# Altium PCB quark_dog_control.PcbDoc (part 1 of 2)
Units mm, origin at the board's own origin, x right, y up, seen from the top; angles counter-clockwise.
Board outline 100 x 60 mm, 4 copper layers (Top Layer 1, GND, VCC, Bottom Layer 1), stack 0.603 mm thick; 105 components, 131 nets, 600 pads, 305 vias.
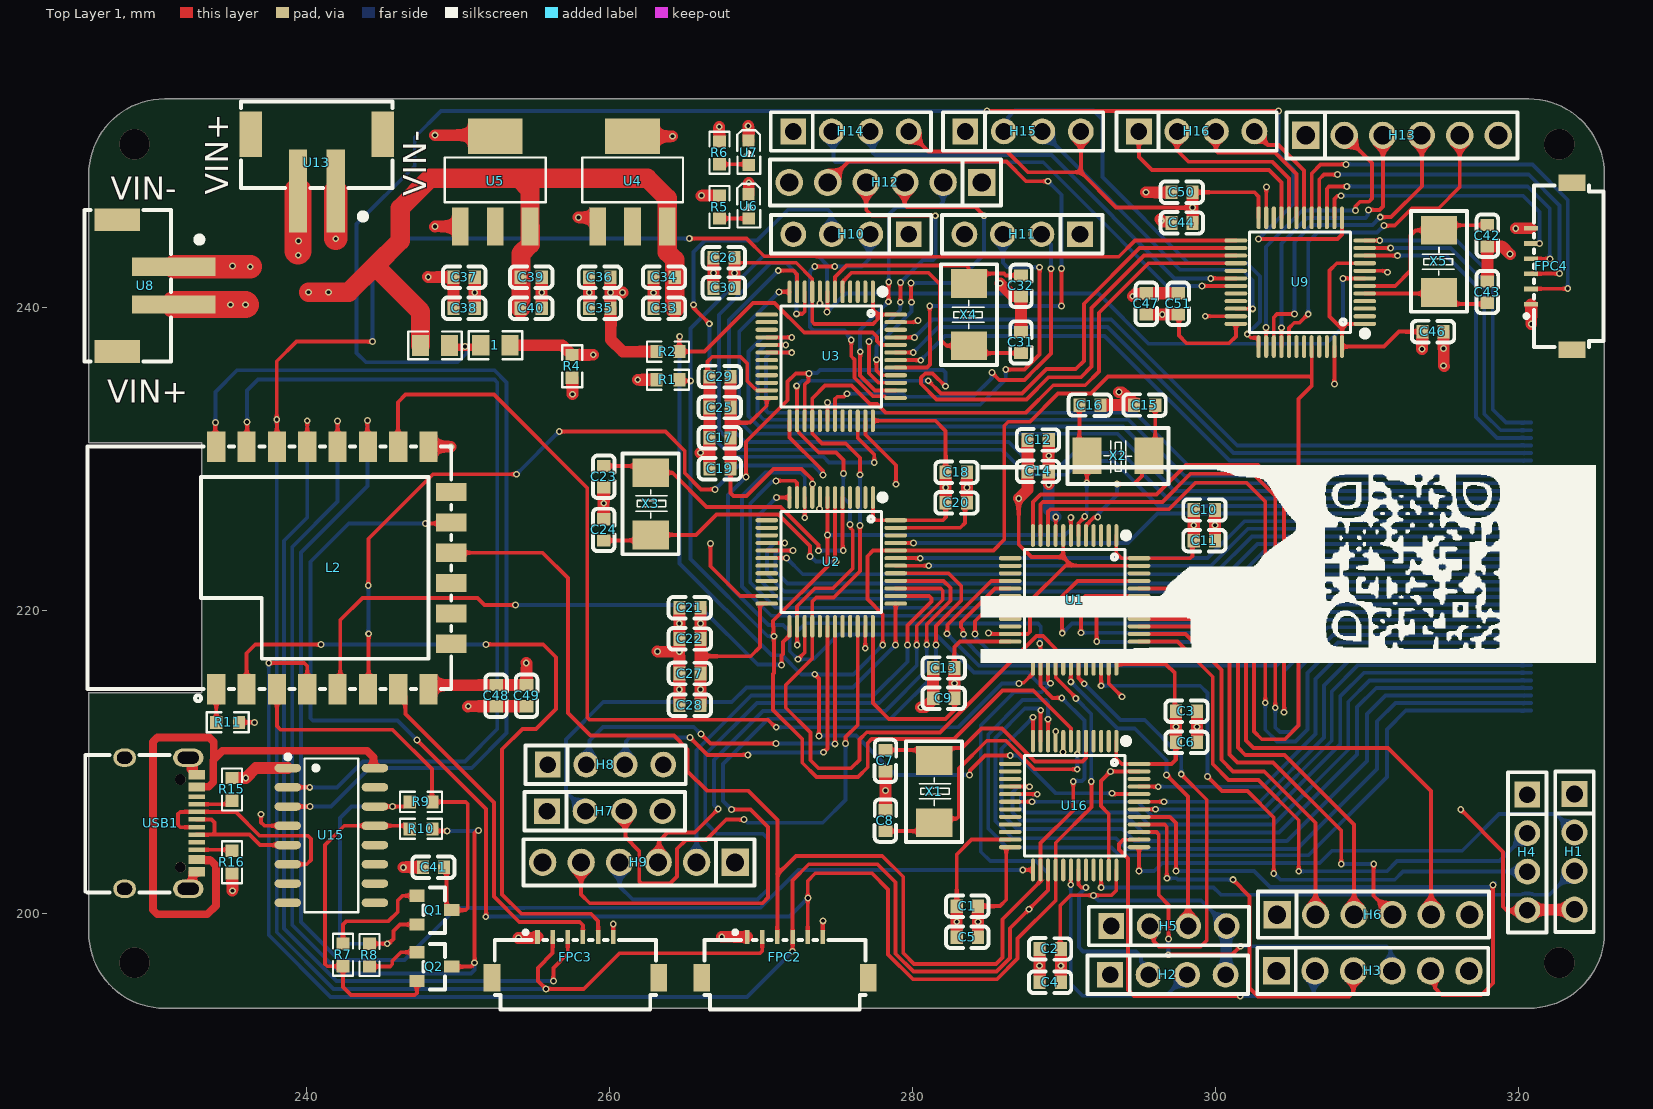
[diagram p0: Top Layer 1 view]
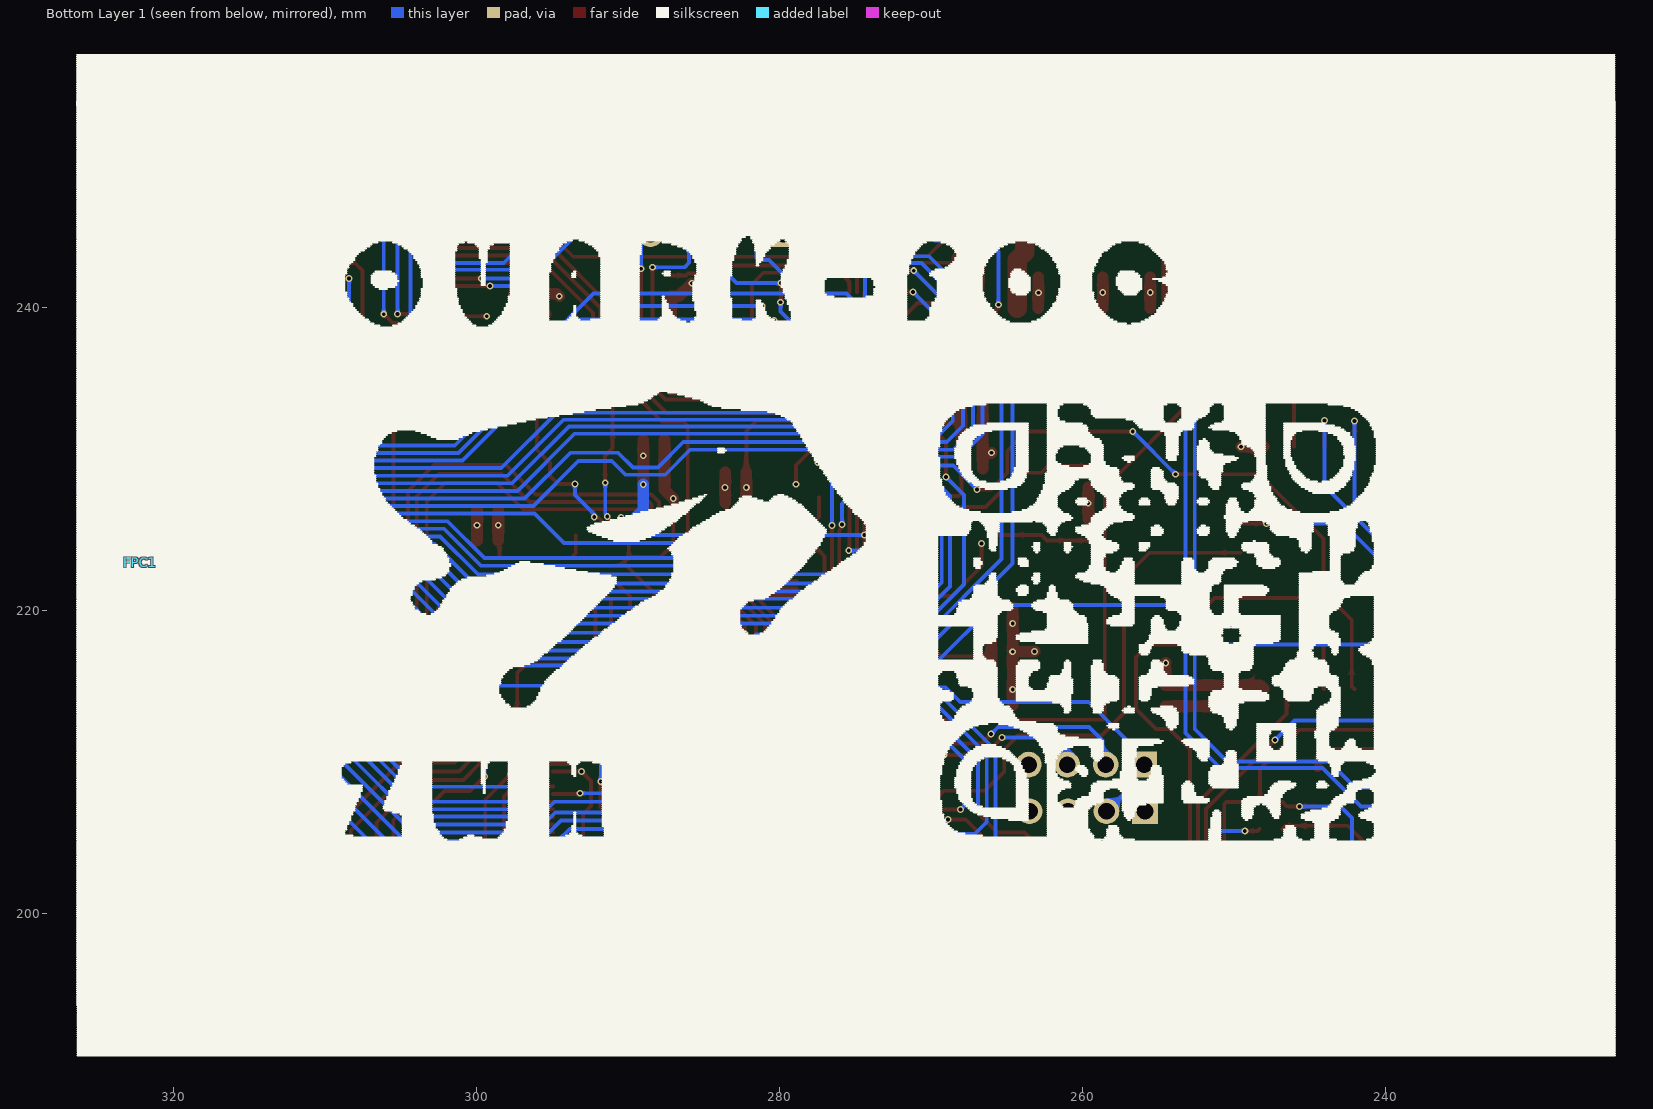
[diagram p1: Bottom Layer 1 view, seen from below]
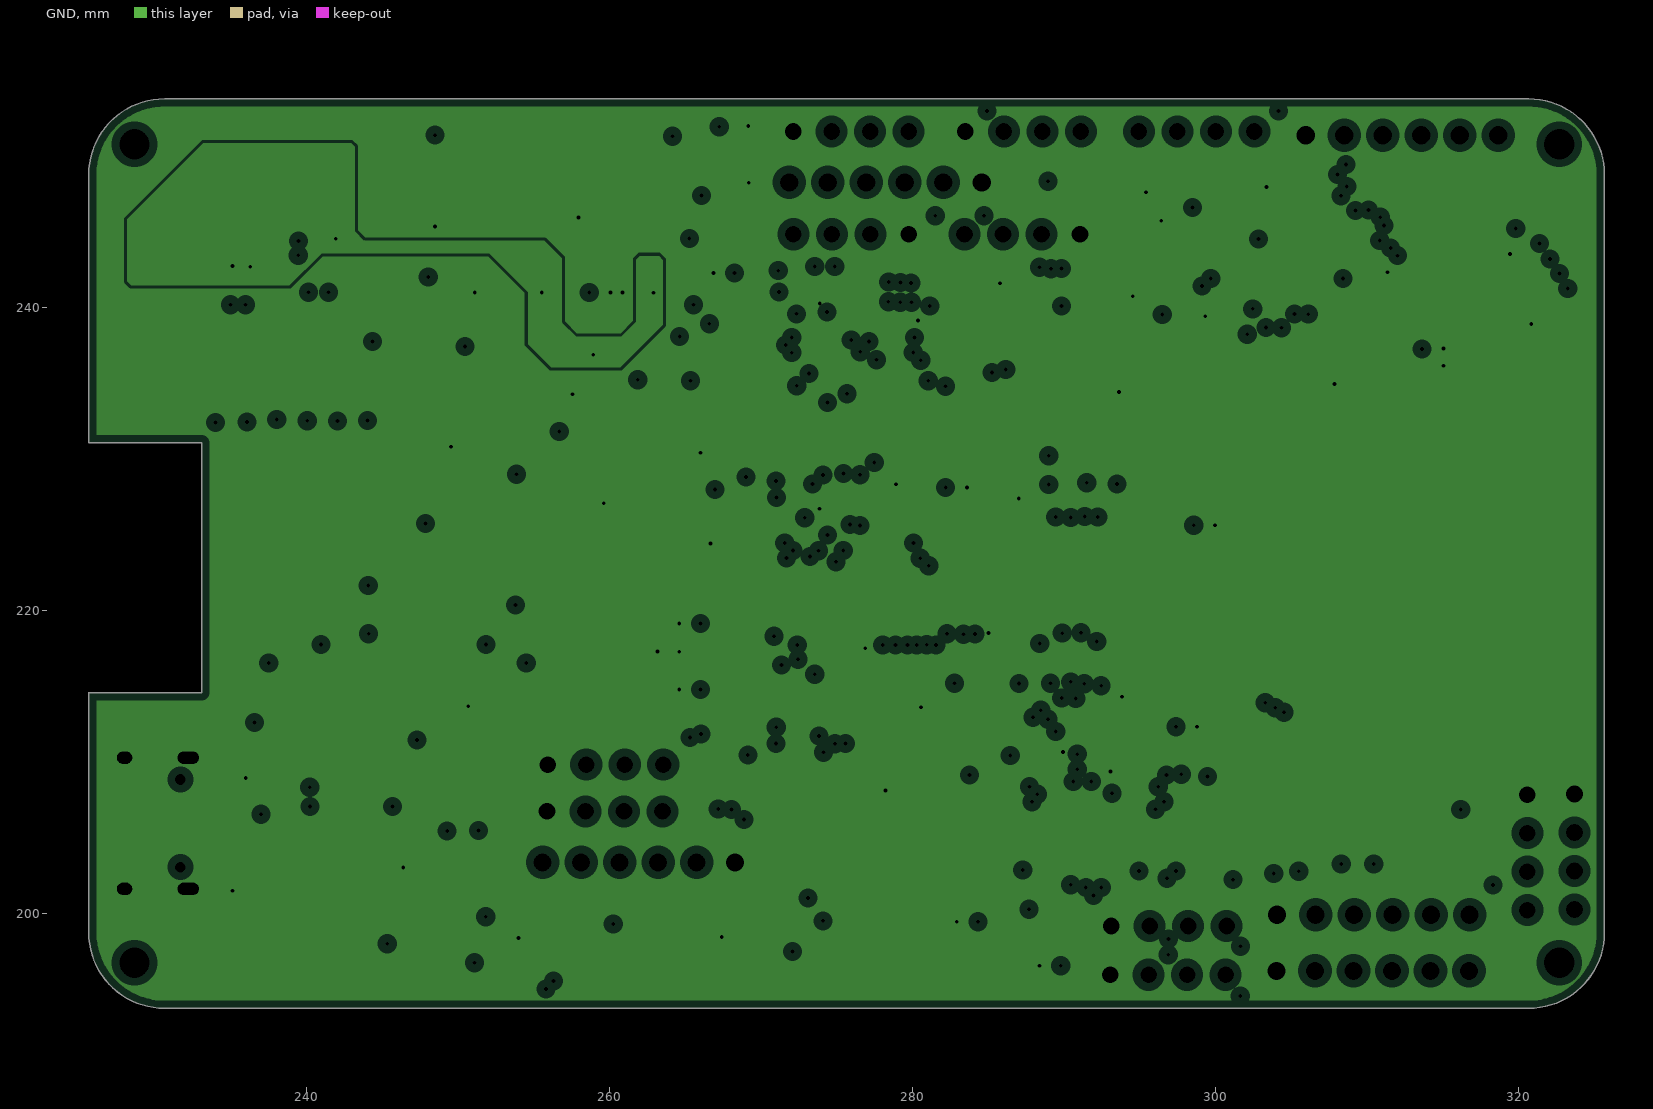
[diagram p2: GND, clearances drawn from the general rule]
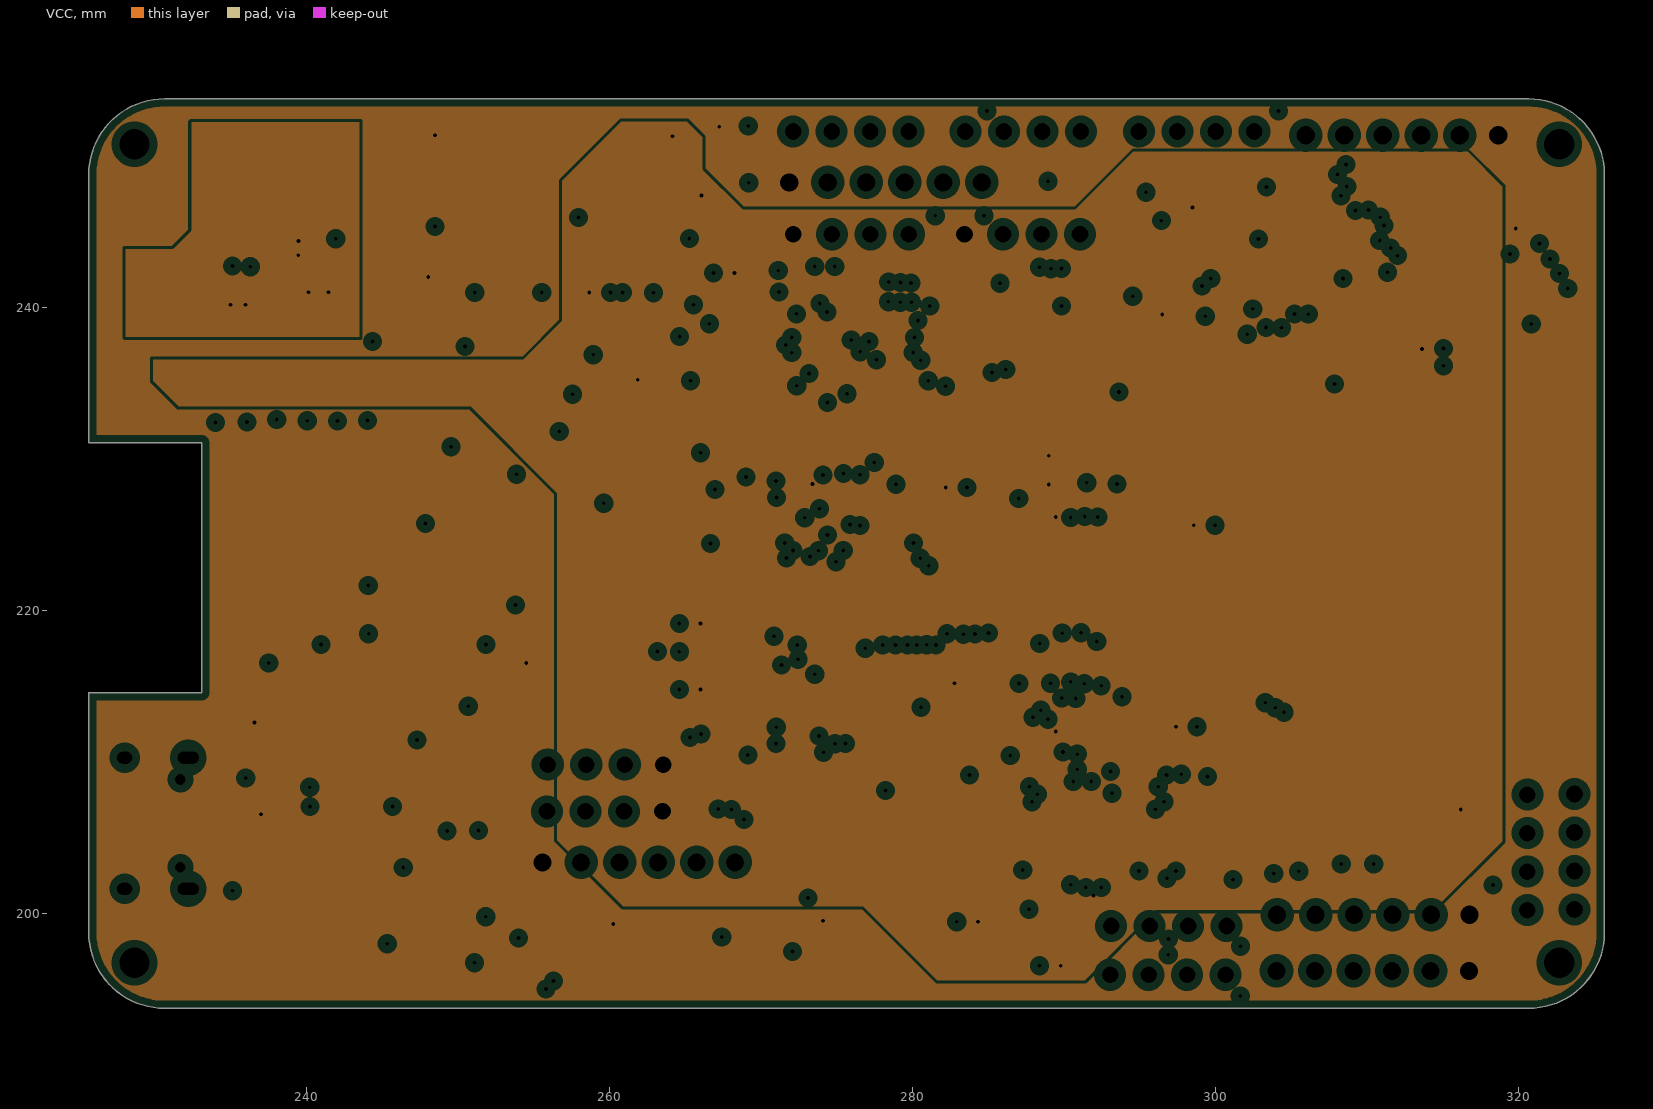
[diagram p3: VCC, clearances drawn from the general rule]

## Layer stack, top to bottom
Top Solder: solder mask 0.0102, Solder Resist, Dk 3.5
Top Layer 1: signal copper 0.035
Dielectric 2: prepreg 0.0711, PP-006, Dk 4.1
GND: plane copper 0.0356, net (Multiple Nets)
Dielectric 1: dielectric 0.32, FR-4, Dk 4.8
VCC: plane copper 0.0356, net (Multiple Nets)
Dielectric 3: prepreg 0.0711, PP-006, Dk 4.1
Bottom Layer 1: signal copper 0.035
Bottom Solder: solder mask 0.0102, Solder Resist, Dk 3.5

## Board outline
225.643,198.731 225.643,214.557 225.646,214.56 233.1,214.56 233.11,214.57 233.11,231.05 225.646,231.05 225.643,231.047 225.643,248.731 cw(c230.643,248.731) 230.643,253.731 320.643,253.731 cw(c320.643,248.731) 325.643,248.731 325.639,248.702 325.639,198.74 325.643,198.731 cw(c320.643,198.731) 320.643,193.731 320.559,193.737 230.643,193.737 230.643,193.731 cw(c230.643,198.731)

## Design rules (kind name [scope] priority, off if disabled: settings)
Clearance [All] p1: gap=0.127 ignorepadtopadclearanceinfootprint=FALSE
PlaneClearance [All] p1: clearance=0.508
PlaneConnect [All] p1: planeconnectstyle=Relief reliefexpansion=0.508 reliefentries=4 reliefconductorwidth=0.254 reliefairgap=0.254
PolygonConnect [All] p1: connectstyle=Relief reliefconductorwidth=0.254 reliefentries=4 polygonreliefangle="90 Angle" airgapwidth=0.254
RoutingVias [All] p1: holewidth=0.711 width=1.27 viastyle="Through Hole" minholewidth=0.711 minwidth=1.27 maxholewidth=0.711 maxwidth=1.27
SolderMaskExpansion [All] p1: expansion=0.102 istentingtop=FALSE
Width [All] p1: maxlimit=50 minlimit=0.254 preferedwidth=0.254 minimp=50.000000 maximp=50.000000 favimp=50.000000
28 further rules are at their usual default settings.

## Components (designator, comment, footprint, x,y, rotation, side; value= is the part's Value field where it differs from the comment)
1 "R0805" R0805 252.476,237.48 r0 top
C1 "0.1u" C0603 283.61,200.47 r0 top
C2 "0.1u" C0603 289.08,197.647 r0 top
C3 "0.1u" C0603 298.07,213.33 r180 top
C4 "0.1u" C0603 289.08,195.441 r0 top
C5 "0.1u" C0603 283.61,198.42 r0 top
C6 "0.1u" C0603 298.07,211.28 r180 top
C7 "22p" C0603 278.21,210.07 r90 top
C8 "22p" C0603 278.21,206.12 r90 top
C9 "0.1u" C0603 282.06,214.18 r0 top
C10 "0.1u" C0603 299.25,226.61 r180 top
C11 "0.1u" C0603 299.25,224.59 r180 top
C12 "0.1u" C0603 288.28,231.23 r0 top
C13 "0.1u" C0603 282.06,216.18 r0 top
C14 "0.1u" C0603 288.28,229.15 r0 top
C15 "22p" C0603 295.31,233.53 r0 top
C16 "22p" C0603 291.7,233.53 r0 top
C17 "0.1u" C0603 267.29,231.378 r0 top
C18 "0.1u" C0603 282.88,229.09 r180 top
C19 "0.1u" C0603 267.29,229.33 r0 top
C20 "0.1u" C0603 282.88,227.08 r180 top
C21 "0.1u" C0603 265.31,220.15 r0 top
C22 "0.1u" C0603 265.31,218.1 r0 top
C23 "22p" C0603 259.62,228.81 r90 top
C24 "22p" C0603 259.62,225.3 r90 top
C25 "0.1u" C0603 267.29,233.37 r0 top
C26 "0.1u" C0603 267.554,243.248 r0 top
C27 "0.1u" C0603 265.31,215.82 r0 top
C28 "0.1u" C0603 265.31,213.72 r0 top
C29 "0.1u" C0603 267.29,235.41 r0 top
C30 "0.1u" C0603 267.554,241.26 r0 top
C31 "22p" C0603 287.15,237.66 r270 top
C32 "22p" C0603 287.15,241.39 r270 top
C33 "0.1u" C0603 263.61,239.92 r0 top
C34 "10u" C0603 263.61,241.97 r0 top
C35 "10u" C0603 259.36,239.925 r180 top
C36 "0.1u" C0603 259.36,241.975 r180 top
C37 "0.1u" C0603 250.41,241.975 r180 top
C38 "10u" C0603 250.41,239.925 r180 top
C39 "10u" C0603 254.83,241.975 r180 top
C40 "0.1u" C0603 254.83,239.925 r180 top
C41 "1u" C0603 248.39,203.04 r0 top
C42 "22p" C0603 317.92,244.7 r270 top
C43 "22p" C0603 317.92,240.98 r270 top
C44 "0.1u" C0603 297.77,245.548 r0 top
C46 "0.1u" C0603 314.33,238.38 r180 top
C47 "0.1u" C0603 295.42,240.21 r270 top
C48 "0.1u" C0603 252.52,214.36 r90 top
C49 "10u" C0603 254.53,214.36 r90 top
C50 "0.1u" C0603 297.77,247.57 r0 top
C51 "0.1u" C0603 297.52,240.21 r270 top
FPC1 "FPC-05F-40PH15" FPC-SMD_40P-P0.50_FPC-05F-40PH15 322.16,223.12 r270 bottom locked
FPC2 "1.0K-1.5-6PWB" FPC-SMD_6P-P1.00_HDGC_1.0K-1.5-6PWB 271.58,197.09 r0 top
FPC3 "1.0K-1.5-6PWB" FPC-SMD_6P-P1.00_HDGC_1.0K-1.5-6PWB 257.75,197.09 r0 top
FPC4 "1.0K-1.5-6PWB" FPC-SMD_6P-P1.00_HDGC_1.0K-1.5-6PWB 322.15,242.69 r90 top
H1 "Z-211-0411-0021-001" HDR-TH_4P-P2.54-V-M 323.67,204.06 r270 top
H2 "Z-211-0411-0021-001" HDR-TH_4P-P2.54-V-M 296.84,195.946 r0 top
H3 "Z-211-0611-0021-001" HDR-TH_6P-P2.54-V_Z-211-0611-0021-001 310.36,196.2 r0 top
H4 "Z-211-0411-0021-001" HDR-TH_4P-P2.54-V-M 320.56,204.02 r270 top
H5 "Z-211-0411-0021-001" HDR-TH_4P-P2.54-V-M 296.91,199.16 r0 top
H6 "Z-211-0611-0021-001" HDR-TH_6P-P2.54-V_Z-211-0611-0021-001 310.4,199.91 r0 top
H7 "Z-211-0411-0021-001" HDR-TH_4P-P2.54-V-M 259.69,206.73 r0 top
H8 "Z-211-0411-0021-001" HDR-TH_4P-P2.54-V-M 259.74,209.81 r0 top
H9 "Z-211-0611-0021-001" HDR-TH_6P-P2.54-V_Z-211-0611-0021-001 261.94,203.36 r180 top
H10 "Z-211-0411-0021-001" HDR-TH_4P-P2.54-V-M 275.94,244.8 r180 top
H11 "Z-211-0411-0021-001" HDR-TH_4P-P2.54-V-M 287.23,244.8 r180 top
H12 "Z-211-0611-0021-001" HDR-TH_6P-P2.54-V_Z-211-0611-0021-001 278.21,248.22 r180 top
H13 "Z-211-0611-0021-001" HDR-TH_6P-P2.54-V_Z-211-0611-0021-001 312.29,251.33 r0 top
H14 "Z-211-0411-0021-001" HDR-TH_4P-P2.54-V-M 275.93,251.584 r0 top
H15 "Z-211-0411-0021-001" HDR-TH_4P-P2.54-V-M 287.29,251.584 r0 top
H16 "Z-211-0411-0021-001" HDR-TH_4P-P2.54-V-M 298.74,251.584 r0 top
L2 "ESP32-C3F-2M" WIFIM-SMD_ESP32-C3F-2M 241.81,222.79 r90 top locked
Q1 "S8050LT1-J3Y" SOT-23_L2.9-W1.3-P1.90-LS2.4-BR 248.44,200.21 r180 top
Q2 "S8050LT1-J3Y" SOT-23_L2.9-W1.3-P1.90-LS2.4-BR 248.44,196.48 r180 top
R1 "10k" R0603 263.86,235.2 r0 top
R2 "1k" R0603 263.86,237.06 r0 top
R4 "0Ω" R0603 257.54,236.09 r270 top
R5 "1KΩ" R0603 267.26,246.598 r90 top
R6 "1KΩ" R0603 267.26,250.175 r270 top
R7 "4.7k" R0603 242.42,197.26 r270 top
R8 "4.7k" R0603 244.17,197.243 r90 top
R9 "4.7k" R0603 247.57,207.35 r180 top
R10 "4.7k" R0603 247.57,205.57 r0 top
R11 "4.7k" R0603 234.81,212.6 r0 top
R15 "5.1k" R0603 235.09,208.173 r90 top
R16 "5.1k" R0603 235.09,203.37 r270 top
U1 "STM32F103C8T6" LQFP-48_L7.0-W7.0-P0.50-LS9.0-BL 290.69,220.677 r180 top
U2 "STM32F103C8T6" LQFP-48_L7.0-W7.0-P0.50-LS9.0-BL 274.63,223.183 r180 top
U3 "STM32F103C8T6" LQFP-48_L7.0-W7.0-P0.50-LS9.0-BL 274.63,236.75 r180 top
U4 "AMS1117-3.3" SOT-223-3_L6.5-W3.4-P2.30-LS7.0-BR 261.52,248.29 r270 top
U5 "AMS1117-3.3" SOT-223-3_L6.5-W3.4-P2.30-LS7.0-BR 252.46,248.29 r270 top
U6 "LED_0603_R" LED0603-RD 269.184,246.641 r270 top
U7 "LED_0603_R" LED0603-RD 269.184,250.179 r270 top
U8 "WAFER-XH2.54-2PLB" CONN-SMD_2P-P2.50_XUNPU_WAFER-XH2.54-2PLB 229.385,241.41 r270 top
U9 "STM32F103C8T6" LQFP-48_L7.0-W7.0-P0.50-LS9.0-BL 305.58,241.64 r90 top
U13 "WAFER-XH2.54-2PLB" CONN-SMD_2P-P2.50_XUNPU_WAFER-XH2.54-2PLB 240.69,249.53 r180 top
U15 "CH340C" SOP-16_L10.0-W3.9-P1.27-LS6.0-BL 241.65,205.14 r270 top
U16 "STM32F103C8T6" LQFP-48_L7.0-W7.0-P0.50-LS9.0-BL 290.69,207.11 r180 top
USB1 "TYPE-C 16PIN 2MD(073)" USB-C-SMD_TYPE-C-6PIN-2MD-073 230.385,205.94 r270 top
X1 "8MHz" OSC-SMD_L5.0-W3.2 281.42,208.03 r90 top
X2 "8MHz" OSC-SMD_L5.0-W3.2 293.555,230.18 r0 top
X3 "8MHz" OSC-SMD_L5.0-W3.2 262.716,227.018 r90 top
X4 "8MHz" OSC-SMD_L5.0-W3.2 283.72,239.5 r270 top
X5 "8MHz" OSC-SMD_L5.0-W3.2 314.73,243.01 r270 top
? "R0805" R0805 248.49,237.47 r180 top

## Footprints (in the part's own frame and the unit in brackets; to place one, negate y for a bottom-side part, rotate by r counter-clockwise, add the part's x,y. Pads: shape width x height; smd on the part's side, far side on the other; paste and mask are expansions set on the pad)
C0603 [mm]
  rect 0.8x0.9 smd: 1(-0.7,0) 2(0.7,0)
  silkscreen extent -1.41,-0.71 1.39,0.72
CONN-SMD_2P-P2.50_XUNPU_WAFER-XH2.54-2PLB [mm]
  rect 1.2x5.5 smd: 1(-1.25,1.875) 2(1.25,1.875)
  rect 1.5x3 smd: 3(4.35,-1.875) 4(-4.35,-1.875)
  silkscreen extent -5,-4.02 5,3.76
FPC-SMD_6P-P1.00_HDGC_1.0K-1.5-6PWB [mm]
  rect 0.3x0.9 smd: 1(-2.5,1.35) 2(-1.5,1.35) 3(-0.5,1.35) 4(0.5,1.35) 5(1.5,1.35) 6(2.5,1.35)
  rect 1.1x1.8 smd: 7(5.5,-1.35) 8(-5.5,-1.35)
  silkscreen extent -5.32,-3.43 5.32,1.78
FPC-SMD_40P-P0.50_FPC-05F-40PH15 [mm]
  rect 0.3x0.9 smd: 1(-9.75,1.35) 2(-9.25,1.35) 3(-8.75,1.35) 4(-8.25,1.35) 5(-7.75,1.35) 6(-7.25,1.35) 7(-6.75,1.35) 8(-6.25,1.35) 9(-5.75,1.35) 10(-5.25,1.35) 11(-4.75,1.35) 12(-4.25,1.35) 13(-3.75,1.35) 14(-3.25,1.35) 15(-2.75,1.35) 16(-2.25,1.35) 17(-1.75,1.35) 18(-1.25,1.35) 19(-0.75,1.35) 20(-0.25,1.35) 21(0.25,1.35) 22(0.75,1.35) 23(1.25,1.35) 24(1.75,1.35) 25(2.25,1.35) 26(2.75,1.35) 27(3.25,1.35) 28(3.75,1.35) 29(4.25,1.35) 30(4.75,1.35) 31(5.25,1.35) 32(5.75,1.35) 33(6.25,1.35) 34(6.75,1.35) 35(7.25,1.35) 36(7.75,1.35) 37(8.25,1.35) 38(8.75,1.35) 39(9.25,1.35) 40(9.75,1.35)
  rect 1.1x1.8 smd: 41(11.9,-1.35) 42(-11.9,-1.35)
  silkscreen extent -12.05,-3.35 12.05,1.82
HDR-TH_4P-P2.54-V-M [mm]
  rect 1.7x1.7 hole 1.1: 1(-3.81,0)
  round 1.7 hole 1.1: 2(-1.27,0) 3(1.27,0) 4(3.81,0)
  silkscreen extent -5.29,-1.27 5.29,1.27
HDR-TH_6P-P2.54-V_Z-211-0611-0021-001 [mm]
  rect 1.8x1.8 hole 1.2: 1(-6.35,0)
  round 1.8 hole 1.2: 2(-3.81,0) 3(-1.27,0) 4(1.27,0) 5(3.81,0) 6(6.35,0)
  silkscreen extent -7.62,-1.52 7.62,1.52
LED0603-RD [mm]
  rect 0.8x0.8 smd: 1(-0.799,-0.003) 2(0.799,0.004)
  silkscreen extent -1.49,-0.75 1.39,0.76
LQFP-48_L7.0-W7.0-P0.50-LS9.0-BL [mm]
  oval 0.27x1.5 smd: 1(-2.75,-4.25) 2(-2.25,-4.25) 3(-1.75,-4.25) 4(-1.25,-4.25) 5(-0.75,-4.25) 6(-0.25,-4.25) 7(0.25,-4.25) 8(0.75,-4.25) 9(1.25,-4.25) 10(1.75,-4.25) 11(2.25,-4.25) 12(2.75,-4.25) 25(2.75,4.25) 26(2.25,4.25) 27(1.75,4.25) 28(1.25,4.25) 29(0.75,4.25) 30(0.25,4.25) 31(-0.25,4.25) 32(-0.75,4.25) 33(-1.25,4.25) 34(-1.75,4.25) 35(-2.25,4.25) 36(-2.75,4.25)
  oval 1.5x0.27 smd: 13(4.25,-2.75) 14(4.25,-2.25) 15(4.25,-1.75) 16(4.25,-1.25) 17(4.25,-0.75) 18(4.25,-0.25) 19(4.25,0.25) 20(4.25,0.75) 21(4.25,1.25) 22(4.25,1.75) 23(4.25,2.25) 24(4.25,2.75) 37(-4.25,2.75) 38(-4.25,2.25) 39(-4.25,1.75) 40(-4.25,1.25) 41(-4.25,0.75) 42(-4.25,0.25) 43(-4.25,-0.25) 44(-4.25,-0.75) 45(-4.25,-1.25) 46(-4.25,-1.75) 47(-4.25,-2.25) 48(-4.25,-2.75)
  silkscreen extent -3.59,-4.46 3.3,3.34
OSC-SMD_L5.0-W3.2 [mm]
  rect 1.9x2.4 smd: 1(-2.05,0) 2(2.05,0)
  silkscreen extent -3.32,-1.85 3.33,1.85
R0603 [mm]
  rect 0.806x0.864 smd: 1(-0.753,0) 2(0.753,0)
  silkscreen extent -1.39,-0.66 1.39,0.66
R0805 [mm]
  rect 1.133x1.377 smd mask+0.051: 1(-0.966,0) 2(0.966,0)
  silkscreen extent -1.76,-0.92 1.76,0.92
SOP-16_L10.0-W3.9-P1.27-LS6.0-BL [mm]
  oval 0.56x1.745 smd: 1(-4.445,-2.873) 2(-3.175,-2.873) 3(-1.905,-2.873) 4(-0.635,-2.873) 5(0.635,-2.873) 6(1.905,-2.873) 7(3.175,-2.873) 8(4.445,-2.873) 9(4.445,2.873) 10(3.175,2.873) 11(1.905,2.873) 12(0.635,2.873) 13(-0.635,2.873) 14(-1.905,2.873) 15(-3.175,2.873) 16(-4.445,2.873)
  silkscreen extent -5.33,-3.02 5.08,1.77
SOT-23_L2.9-W1.3-P1.90-LS2.4-BR [mm]
  rect 1x0.8 smd: 1(1.15,-0.95) 2(1.15,0.95) 3(-1.15,0)
  silkscreen extent -0.7,-1.5 0.7,1.5
SOT-223-3_L6.5-W3.4-P2.30-LS7.0-BR [mm]
  rect 2.5x1.1 smd: 1(2.97,-2.3) 2(2.97,0) 3(2.97,2.3)
  rect 2.34x3.6 smd: 4(-2.97,0)
  silkscreen extent -1.57,-3.33 1.37,3.33
USB-C-SMD_TYPE-C-6PIN-2MD-073 [mm]
  rect 0.6x1.1 smd: 1(-3.2,2.375) 2(-2.4,2.375) 11(2.4,2.375) 12(3.2,2.375)
  rect 0.3x1.1 smd: 3(-1.75,2.375) 4(-1.25,2.375) 5(-0.75,2.375) 6(-0.25,2.375) 7(0.25,2.375) 8(0.75,2.375) 9(1.25,2.375) 10(1.75,2.375)
  oval 1.2x2 hole 0.8 slot 1.4 at 90 deg: 13(-4.325,1.825) 14(4.325,1.825)
  oval 1.2x1.5 hole 0.8 slot 1 at 90 deg: 13(-4.325,-2.375) 14(4.325,-2.375)
  round 0.7 hole 0.7 unplated: ""(-2.89,1.305) ""(2.89,1.305)
  silkscreen extent -4.5,-4.97 4.57,0.6
WIFIM-SMD_ESP32-C3F-2M [mm]
  rect 2x1.2 smd: 1(-8,7.75) 2(-8,5.75) 3(-8,3.75) 4(-8,1.75) 5(-8,-0.25) 6(-8,-2.25) 7(-8,-4.25) 8(-8,-6.25) 15(8,-6.25) 16(8,-4.25) 17(8,-2.25) 18(8,-0.25) 19(8,1.75) 20(8,3.75) 21(8,5.75) 22(8,7.75)
  rect 1.2x2 smd: 9(-5,-7.75) 10(-3,-7.75) 11(-1,-7.75) 12(1,-7.75) 13(3,-7.75) 14(5,-7.75)
  silkscreen extent -8.8,-7.75 8,16.25

## Part data
C33 C34 C35 C36 C37 C38 C39 C40 C41 C48 C49: Package Display=No, Contributor=LCEDA_Lib, nameAlias=Value(F), spicePre=C, spiceSymbolName=C_0603_US
FPC1 U8 U13: BOM_JLCPCB Part Class="Extended Part", BOM_Manufacturer=XUNPU(讯普), BOM_Supplier=LCSC
  FPC1: BOM_Manufacturer Part=FPC-05F-40PH15, BOM_Supplier Part=C2856825, Contributor=LCSC, spicePre=F, spiceSymbolName=FPC-05F-40PH15
  U8 U13: BOM_Manufacturer Part=WAFER-XH2.54-2PLB, BOM_Supplier Part=C3029467, Contributor=lcsc, link=https://atta.szlcsc.com/upload/public/pdf/source/20220527/139842C6548CEDBA8D9F0F4A441614CD.pdf, spicePre=U, spiceSymbolName=WAFER-XH2.54-2PLB
FPC2 FPC3 FPC4: BOM_JLCPCB Part Class="Extended Part", BOM_Manufacturer=HDGC(华德共创), BOM_Manufacturer Part=1.0K-1.5-6PWB, BOM_Supplier=LCSC, BOM_Supplier Part=C2919568, Contributor=LCSC, spicePre=F, spiceSymbolName=1.0K-1.5-6PWB
H1 H2 H4 H5 H7 H8 H10 H11 H14 H15 H16: BOM_JLCPCB Part Class="Extended Part", BOM_Manufacturer=ZHENGLING, BOM_Manufacturer Part=Z-211-0411-0021-001, BOM_Supplier=LCSC, BOM_Supplier Part=C152150, Contributor=LCSC, spicePre=H, spiceSymbolName=Z-211-0411-0021-001
H3 H6 H9 H12 H13: BOM_JLCPCB Part Class="Extended Part", BOM_Manufacturer="Nextronics Engineering", BOM_Manufacturer Part=Z-211-0611-0021-001, BOM_Supplier=LCSC, BOM_Supplier Part=C190819, Contributor=LCSC, spicePre=H, spiceSymbolName=Z-211-0611-0021-001
L2: BOM_JLCPCB Part Class="Extended Part", BOM_Manufacturer=Ai-Thinker(安信可), BOM_Manufacturer Part=ESP32-C3F-2M, BOM_Supplier=LCSC, BOM_Supplier Part=C2830867, Contributor=LCSC, spicePre=L, spiceSymbolName=ESP32-C3F-2M
Q1 Q2: BOM_JLCPCB Part Class="Extended Part", BOM_Manufacturer=FH(风华), BOM_Manufacturer Part=S8050LT1-J3Y, BOM_Supplier=LCSC, BOM_Supplier Part=C2962087, Contributor=lcsc, link=https://atta.szlcsc.com/upload/public/pdf/source/20220411/740B3F4857AB400E9826209E74F1EDA4.pdf, spicePre=Q, spiceSymbolName=S8050LT1-J3Y
U1 U2 U3 U9 U16: BOM_LCSC Assembly=Yes, BOM_Manufacturer=STMicroelectronics, BOM_Manufacturer Part=STM32F103C8T6, BOM_Supplier=LCSC, BOM_Supplier Part=C8734, image=//image.lceda.cn/szlcsc/C8734.jpg, SMT Type=Basic, spicePre=U, spiceSymbolName=STM32F103C8T6, timeStamp=1455028086
U4 U5: BOM_JLCPCB Part Class="Basic Part", BOM_Manufacturer=AMS, BOM_Manufacturer Part=AMS1117-3.3, BOM_Supplier=LCSC, BOM_Supplier Part=C6186, sourceId=dwIGgezVh, spicePre=U, spiceSymbolName=AMS1117-3.3, timeStamp=1476261164
U6 U7: BOM_JLCPCB Part Class="Extended Part", BOM_Manufacturer=null, BOM_Manufacturer Part=LED_0603_R, BOM_Supplier=LCSC, BOM_Supplier Part=C9900016084, Contributor=lcsc, spicePre=U, spiceSymbolName=LED_0603_R
U15: BOM_Manufacturer=WCH, BOM_Manufacturer Part=CH340C, BOM_Paste Type=recommend, BOM_Supplier=LCSC, BOM_Supplier Part=C84681, spicePre=U, spiceSymbolName=CH340C
USB1: BOM_JLCPCB Part Class="Extended Part", BOM_Manufacturer="SHOU HAN(首韩)", BOM_Manufacturer Part="TYPE-C 16PIN 2MD(073)", BOM_Supplier=LCSC, BOM_Supplier Part=C2765186, Contributor=LCSC, spicePre=U, spiceSymbolName="TYPE-C 16PIN 2MD(073)"
X1 X2 X3 X4 X5: BOM_JLCPCB Part Class="Extended Part", BOM_Manufacturer="TXC Corp", BOM_Manufacturer Part=7A08000001, BOM_Supplier=LCSC, BOM_Supplier Part=C331616, Contributor=LCSC, nameAlias=Frequency, spicePre=X, spiceSymbolName=7A08000001
C1 C2 C3 C4 C5 C6 C7 C8 C9 C10 C11 C12 C13 C14 C15 C16 C17 C18 C19 C20 C21 C22 C23 C24 C25 C26 C27 C28 C29 C30 C31 C32 C42 C43 C44 C46 C47 C50 C51: Contributor=LCEDA_Lib, nameAlias=Value(F), spicePre=C, spiceSymbolName=C_0603_US
R1 R2 R4 R5 R6 R7 R8 R9 R10 R11 R15 R16: Contributor=LCEDA_Lib, nameAlias=Value(Ω), spicePre=R, spiceSymbolName=R_0603_EU

## Via types
v1: diameter 0.45, hole 0.25, Top Layer 1 to Bottom Layer 1, tented both sides, 301 vias
v2: diameter 2, hole 2, Top Layer 1 to Bottom Layer 1, 4 vias

## Nets (pads, with @x,y where several pads share a name; then routed paths per layer and width w, separated by ;. In a path a pad name is that pad's centre, name@x,y a point inside that pad or via, vN(x,y) a via of type N, cw(c..) or ccw(c..) an arc to the next point about the centre after c; other vN are vias at no path point)
BOOT0: R2.2 U1.44 U2.44 U3.44 U9.44 U16.44 | length 168.3
  Top Layer 1 w0.254: v1(264.63,238.05) 264.613,238.033 R2.2@264.613,237.06 266.27,237.06 269.47,240.26 270.9,240.26 272.85,238.31 277.37,238.31 277.64,238.04 277.64,237.77 277.91,237.5 U3.44@278.88,237.5 ; v1(273.54,215.77) 273.82,215.49 v1(273.82,211.7) ; v1(278.03,217.7) 278.03,219.72 277.02,220.73 277.02,223.56 277.396,223.936 278.877,223.936 U2.44@278.88,223.933 285.33,223.933 286.05,224.653 286.05,232.17 286.31,232.43 287.74,232.43 289.6,234.29 291.778,234.29 292.894,235.406 306.224,235.406 306.33,235.3 ; v1(283.76,209.13) 283.798,209.168 283.798,209.427 284.781,210.41 v1(286.44,210.41) ; v1@293.19,207.91 293.24,207.86 U16.44@294.94,207.86 ; U1.44@294.94,221.427 301.233,221.427 302.53,220.13 302.53,211.99 303.04,211.48 304.56,211.48 305.47,212.39 305.47,233.93 306.33,234.79 306.33,235.3 ; U9.44@306.33,237.39 306.33,235.3
  Bottom Layer 1 w0.254: v1(264.63,238.05) 264.63,223.09 270.69,217.03 271.38,217.03 272.65,215.76 276.09,215.76 v1(278.03,217.7) ; v1(273.82,211.7) 273.85,211.73 276.26,211.73 278.86,209.13 v1(283.76,209.13) ; v1(286.44,210.41) 286.95,210.41 289.433,207.927 289.433,207.917 v1(293.151,207.917)
D+: U15.5 USB1.6 USB1.8 | length 8.4
  Top Layer 1 w0.254: USB1.8@232.76,205.19 233.801,205.19 ; USB1.6@232.76,206.19 233.75,206.19 233.95,205.99 233.95,205.339 233.801,205.19 ; U15.5@238.777,204.505 236.935,204.505 236.25,205.19 233.801,205.19
D-: U15.6 USB1.5 USB1.7 | length 14.7
  Top Layer 1 w0.254: USB1.7@232.76,205.69 232.75,205.68 231.679,205.68 231.53,205.829 231.53,206.541 231.679,206.69 USB1.5@232.76,206.69 235.35,206.69 236.92,205.12 240.12,205.12 240.319,204.921 240.319,203.523 240.031,203.235 U15.6@238.777,203.235
DGND: C1.1 C2.1 C3.1 C4.1 C5.1 C6.1 C7.1 C8.2 C9.1 C10.1 C11.1 C12.1 C13.1 C14.1 C15.1 C16.2 C17.1 C18.1 C19.1 C20.1 C21.1 C22.1 C23.1 C24.2 C25.1 C26.1 C27.1 C28.1 C29.1 C30.1 C31.1 C32.2 C35.1 C36.1 C37.1 C38.1 C41.1 C42.2 C43.1 C44.1 C46.1 C47.1 C48.1 C49.1 C50.1 C51.1 FPC2.1 FPC3.1 FPC4.1 H1.1 H2.1 H3.1 H4.1 H5.1 H6.1 H7.1 H8.1 H9.1 H10.1 H11.1 H12.1 H13.1 H14.1 H15.1 L2.15 R2.1 R4.2 R15.2 R16.2 U1.8 U1.23 U1.35 U1.47 U2.8 U2.23 U2.35 U2.47 U3.8 U3.23 U3.35 U3.47 U4.1 U5.1 U6.1 U7.1 U9.8 U9.23 U9.35 U9.47 U15.1 U16.8 U16.23 U16.35 U16.47 USB1.1 USB1.12 USB1.13 USB1.14 | length 168.6
  Top Layer 1 w0.254: C29.1@266.59,235.41 266.47,235.53 266.47,236.41 266.78,236.72 268.64,236.72 269.09,236.27 269.09,235.125 269.604,234.611 269.65,234.611 269.761,234.5 U3.23@270.38,234.5 ; v1(266.66,224.4) 266.66,222.9 268.627,220.933 U2.23@270.38,220.933 ; v1(276.88,217.49) U2.35@276.88,218.933 ; U3.35@276.88,232.5 276.883,232.497 276.883,231.577 278.9,229.56 v1(278.9,228.31) ; U2.47@278.88,225.433 283.143,225.433 283.46,225.75 283.46,226.96 C20.1@283.58,227.08 ; U3.47@278.88,239 280.24,239 v1(280.36,239.12) ; C1.1@282.91,200.47 282.91,203.88 283.89,204.86 U16.23@286.44,204.86 ; v1(285.01,218.5) 285.083,218.427 U1.23@286.44,218.427 287.601,218.427 287.75,218.576 287.75,220.6 290.077,222.927 290.513,222.927 ; v1(287,227.37) 287,224.34 287.84,223.5 289.94,223.5 ; U1.8@289.94,224.927 289.94,223.5 ; U16.35@292.94,202.86 292.94,206.554 292.42,207.074 292.42,208.73 v1(293.05,209.36) U16.47@294.94,209.36 ; U1.35@292.94,216.427 292.94,215.17 v1(293.82,214.29) ; U1.47@294.94,222.927 290.513,222.927 ; v1@299.29,239.37 v1(299.31,239.39) U9.35@301.33,239.39 ; U9.23@303.33,245.89 303.33,247.9 v1@303.36,247.93 ; U9.47@307.83,237.39 307.83,234.93 v1(307.84,234.92) ; U9.8@309.83,242.39 311.242,242.39 v1(311.342,242.291) ; 289.94,223.5 290.513,222.927
  Top Layer 1 w0.508: USB1.14@232.21,201.615 232.485,201.89 232.485,202.694 232.531,202.74 USB1.12@232.76,202.74
  Top Layer 1 w0.762: USB1.13@232.21,210.265 232.278,210.265 232.48,210.063 232.48,209.54 ; R16.2@235.09,202.617 235.098,202.617 235.12,202.595 v1(235.12,201.49) ; R15.2@235.09,208.926 235.096,208.92 v1(236,208.92) 236.665,209.585 U15.1@238.777,209.585 ; v1(246.4,203.03) 246.41,203.04 C41.1@247.69,203.04 ; L2.15@248.06,230.79 249.53,230.79 v1(249.54,230.78) ; v1(248.49,245.31) 248.5,245.32 U5.1@250.16,245.32 ; v1@250.66,213.64 v1(250.68,213.66) C48.1@252.52,213.66 C49.1@254.53,213.66 ; C38.1@251.11,239.925 C37.1@251.11,241.975 ; v1(253.99,198.37) 253.991,198.371 255.181,198.371 FPC3.1@255.25,198.44 ; R4.2@257.54,235.337 257.56,235.317 v1(257.56,234.24) ; v1(257.95,245.91) 259.051,245.91 259.22,245.741 U4.1@259.22,245.32 ; C24.2@259.62,226 C23.1@259.62,228.11 ; C36.1@260.06,241.975 v1(260.06,240.95) ; v1@260.87,240.96 v1(260.86,240.95) v1(260.06,240.95) ; R2.1@263.107,237.06 260.88,237.06 260.09,237.85 260.09,239.584 260.079,239.595 260.079,239.906 C35.1@260.06,239.925 v1(260.06,240.95) ; v1(263.163,217.277) 263.18,217.26 v1(264.61,217.26) ; C28.1@264.61,213.72 C27.1@264.61,215.82 v1(264.61,217.26) ; C21.1@264.61,220.15 C22.1@264.61,218.1 v1(264.61,217.26) ; v1(266,230.38) 266.026,230.354 266.59,230.354 ; C19.1@266.59,229.33 266.59,230.354 ; C29.1@266.59,235.41 C25.1@266.59,233.37 C17.1@266.59,231.378 266.59,230.354 ; C30.1@266.854,241.26 C26.1@266.854,243.248 ; v1(267.41,198.44) FPC2.1@269.08,198.44 ; v1(269.15,251.95) 269.161,251.939 269.161,250.997 U7.1@269.18,250.978 ; U6.1@269.18,247.44 269.19,247.45 v1(269.19,248.2) ; C8.2@278.21,206.82 C7.1@278.21,209.37 ; v1(280.55,213.59) 280.82,213.59 281.36,214.13 C9.1@281.36,214.18 C13.1@281.36,216.18 ; C5.1@282.91,198.42 v1(282.91,199.445) C1.1@282.91,200.47 ; C20.1@283.58,227.08 v1(283.58,228.085) C18.1@283.58,229.09 ; v1(285.77,241.57) 286.631,240.709 287.131,240.709 C32.2@287.15,240.69 C31.1@287.15,238.36 ; v1(287,227.37) 287.58,227.95 C14.1@287.58,229.15 C12.1@287.58,231.23 ; C4.1@288.381,195.441 C2.1@288.381,197.647 ; C16.2@292.4,233.53 C15.1@294.61,233.53 294.61,233.58 293.8,234.39 v1(293.61,234.39) ; v1(294.52,240.71) 294.701,240.891 295.401,240.891 C47.1@295.42,240.91 C51.1@297.52,240.91 ; v1@295.39,247.58 v1(295.4,247.57) C50.1@297.07,247.57 ; v1@296.33,245.78 296.493,245.617 297.051,245.617 297.07,245.598 C44.1@297.07,245.548 ; C6.1@298.77,211.28 C3.1@298.77,213.33 ; C11.1@299.95,224.59 C10.1@299.95,226.61 ; C46.1@315.03,238.38 v1(315.03,236.13) v1@315.07,236.09 ; C43.1@317.92,241.68 C42.2@317.92,244 317.939,243.981 318.929,243.981 v1(319.42,243.49) ; FPC4.1@320.8,240.19 320.82,240.17 v1(320.82,238.88)
  other v1: 288.381,196.544 278.21,208.095 289.93,210.64 298.77,212.305 264.61,214.77 264.61,219.125 299.95,225.6 273.86,226.69 259.62,227.055 315.03,237.255 273.88,240.24 251.11,240.95 266.854,242.254 296.411,245.699 303.345,247.915
DTR: Q2.2 R7.2 R10.1 U15.13 | length 22.6
  Top Layer 1 w0.254: R10.1@246.817,205.57 246.612,205.775 U15.13@244.523,205.775 242.505,205.775 241.23,204.5 241.23,196.656 241.379,196.507 R7.2@242.42,196.507 242.42,195.133 242.953,194.6 247.141,194.6 247.29,194.749 Q2.2@247.29,195.53
ESP_EN: C41.2 L2.3 Q1.3 R9.1 | length 29.5
  Top Layer 1 w0.254: L2.3@238.06,214.79 238.06,213.141 238.054,213.134 238.054,212.358 238.302,212.11 245.69,212.11 248.29,209.51 248.29,207.383 R9.1@248.323,207.35 250.5,207.35 250.649,207.201 250.649,200.359 250.5,200.21 249.523,200.21 249.25,200.483 249.25,202.88 C41.2@249.09,203.04
ESP_IO0: L2.1 R11.1 | length 2.2
  Top Layer 1 w0.254: R11.1@234.057,212.6 234.06,212.603 L2.1@234.06,214.79
ESP_IO1: FPC3.5 L2.2 | length 49.2
  Top Layer 1 w0.254: L2.2@236.06,214.79 236.06,217.16 236.63,217.73 v1(240.96,217.73) ; v1(251.86,217.74) 255.63,217.74 256.48,216.89 256.48,213.47 255.16,212.15 254.25,212.15 252.92,210.82 252.92,201.24 254.19,199.97 258.78,199.97 259.25,199.5 FPC3.5@259.25,198.44
  Bottom Layer 1 w0.254: v1(240.96,217.73) 240.965,217.735 251.855,217.735 v1(251.86,217.74)
ESP_IO5: FPC3.4 L2.7 | length 23.7
  Top Layer 1 w0.254: L2.7@246.06,214.79 246.533,214.317 246.533,213.137 252.37,207.3 252.37,201.1 254.05,199.42 258.04,199.42 258.25,199.21 FPC3.4@258.25,198.44
ESP_IO9: L2.18 Q2.3 R10.2 | length 63.7
  Top Layer 1 w0.254: v1@242.05,232.49 v1(242.06,232.48) L2.18@242.06,230.79 ; R10.2@248.323,205.57 248.463,205.43 v1(249.29,205.43) ; Q2.3@249.59,196.48 250.88,196.48 251.1,196.7 251.1,205.311 251.249,205.46 v1(251.35,205.46)
  Bottom Layer 1 w0.254: v1(242.06,232.48) 242.06,227.164 239.07,224.174 239.07,199.23 242.27,196.03 250.871,196.03 251.09,196.249 v1(251.09,196.74) ; v1(249.29,205.43) 251.32,205.43 v1(251.35,205.46)
ESP_IO18: FPC3.3 L2.19 | length 58.4
  Top Layer 1 w0.254: L2.19@240.06,230.79 v1(240.06,232.5) ; v1(256.3,195.53) 256.3,196.38 257.25,197.33 FPC3.3@257.25,198.44
  Bottom Layer 1 w0.254: v1(240.06,232.5) 240.06,226.11 238.53,224.58 238.53,198.99 241.99,195.53 v1(256.3,195.53)
ESP_IO19: FPC2.2 FPC3.2 L2.20 U9.25 | length 149.7
  Top Layer 1 w0.254: L2.20@238.06,230.79 238.06,232.57 v1(238.05,232.58) 238.05,236.42 239.35,237.72 v1(244.37,237.72) ; FPC3.2@256.25,198.44 256.25,197.37 255.28,196.4 255.28,195.54 v1(255.81,195.01) 258.3,195.01 260.65,197.36 269.931,197.36 270.08,197.509 FPC2.2@270.08,198.44 ; v1(265.27,244.513) 269.047,244.513 270.21,243.35 273.62,243.35 273.65,243.32 293.6,243.32 294.67,244.39 U9.25@301.33,244.39
  Bottom Layer 1 w0.254: v1(238.05,232.58) 238.05,198.753 241.793,195.01 v1(255.81,195.01) ; v1(244.37,237.72) 244.36,237.73 244.36,242.87 246.003,244.513 v1(265.27,244.513)
ESP_RX: L2.21 U15.2 | length 58.9
  Top Layer 1 w0.254: L2.21@236.06,230.79 236.09,230.82 v1(236.09,232.41) ; U15.2@238.777,208.315 240.225,208.315 v1(240.23,208.31)
  Bottom Layer 1 w0.254: v1(236.09,232.41) 236.09,234.49 236.81,235.21 252.41,235.21 252.6,235.02 252.6,212.15 250.475,210.025 243.735,210.025 242.02,208.31 v1(240.23,208.31)
ESP_TX: L2.22 U15.3 | length 63.3
  Top Layer 1 w0.254: v1(234,232.39) 234,230.85 L2.22@234.06,230.79 ; U15.3@238.777,207.045 v1(240.235,207.045) v1@240.24,207.04
  Bottom Layer 1 w0.254: v1(234,232.39) 234,234.39 235.435,235.825 252.41,235.825 253.215,235.02 253.215,211.895 250.91,209.59 244.17,209.59 241.625,207.045 v1(240.235,207.045)
IO0: H16.4 U9.18 | length 7.5
  Top Layer 1 w0.254: H16.4@302.55,251.584 303.434,250.7 304.13,250.7 305.83,249 U9.18@305.83,245.89
IO1: H16.3 U9.19 | length 10.1
  Top Layer 1 w0.254: H16.3@300.01,251.584 300.01,250.339 300.159,250.19 303.91,250.19 305.33,248.77 U9.19@305.33,245.89
IO2: H16.2 U9.20 | length 12
  Top Layer 1 w0.254: H16.2@297.47,251.584 297.44,251.554 297.44,250.34 298.19,249.59 303.72,249.59 304.83,248.48 U9.20@304.83,245.89
IO4: FPC4.5 U9.14 | length 17.4
  Top Layer 1 w0.254: U9.14@307.83,245.89 307.83,247.13 308.04,247.34 v1(308.27,247.34) v1@308.28,247.35
  Bottom Layer 1 w0.254: v1(308.27,247.34) 320.28,247.34 321.36,246.26 321.36,244.21 v1(321.37,244.2)
IO5: FPC4.4 U9.15 | length 21.9
  Top Layer 1 w0.254: U9.15@307.33,245.89 307.33,247.801 307.479,247.95 308.64,247.95 v1(308.65,247.96) ; FPC4.4@320.8,243.19 320.81,243.18 322.04,243.18 v1(322.05,243.17)
  Bottom Layer 1 w0.254: v1(308.65,247.96) 320.59,247.96 322.04,246.51 322.04,243.18 v1(322.05,243.17)
IO6: FPC4.3 U9.16 | length 25.8
  Top Layer 1 w0.254: U9.16@306.83,245.89 306.83,248.43 307.14,248.74 v1(308.04,248.74) ; FPC4.3@320.8,242.19 320.815,242.205 322.675,242.205 v1(322.69,242.22)
  Bottom Layer 1 w0.254: v1(308.04,248.74) 320.65,248.74 322.69,246.7 v1(322.69,242.22)
IO7: FPC4.2 U9.17 | length 29.3
  Top Layer 1 w0.254: U9.17@306.33,245.89 306.33,248.82 306.92,249.41 v1(308.59,249.41) ; FPC4.2@320.8,241.19 320.815,241.205 323.205,241.205 v1(323.22,241.22)
  Bottom Layer 1 w0.254: v1(308.59,249.41) 320.89,249.41 323.22,247.08 v1(323.22,241.22)
IO10: H16.1 U9.21 | length 14.1
  Top Layer 1 w0.254: H16.1@294.93,251.584 294.93,249.9 295.79,249.04 303.51,249.04 304.33,248.22 U9.21@304.33,245.89
NetQ1_1: Q1.1 R7.1 | length 7.3
  Top Layer 1 w0.254: R7.1@242.42,198.013 242.42,199.25 242.65,199.48 245.42,199.48 246.03,200.09 246.03,200.84 246.35,201.16 Q1.1@247.29,201.16
NetQ2_1: Q2.1 R8.1 | length 3.6
  Top Layer 1 w0.254: R8.1@244.17,196.49 245.521,196.49 245.67,196.639 245.67,196.85 246.25,197.43 Q2.1@247.29,197.43
NetR5_1: R5.1 U6.2 | length 1.9
  Top Layer 1 w0.254: R5.1@267.26,245.844 269.184,245.844 U6.2@269.187,245.841
NetR6_2: R6.2 U7.2 | length 1.9
  Top Layer 1 w0.254: R6.2@267.26,249.421 269.145,249.421 U7.2@269.187,249.379
NetR15_1: R15.1 USB1.4 | length 2.4
  Top Layer 1 w0.254: USB1.4@232.76,207.19 233.72,207.19 234.86,207.19 R15.1@235.09,207.42
NetR16_1: R16.1 USB1.10 | length 2.4
  Top Layer 1 w0.254: USB1.10@232.76,204.19 235.023,204.19 R16.1@235.09,204.123
NRST: R1.2 U1.7 U2.7 U3.7 U9.7 U16.7 | length 141.6
  Top Layer 1 w0.254: R1.2@264.613,235.2 264.683,235.13 v1(265.35,235.13) ; v1(274.36,239.67) 274.377,239.687 274.377,240.997 U3.7@274.38,241 ; U2.7@274.38,227.433 274.38,222.89 270.79,219.3 270.79,218.901 270.812,218.879 270.812,218.318 v1(270.85,218.28) 270.85,215.853 270.79,215.793 270.79,213.42 272.72,211.49 272.72,209.93 273.66,208.99 276.39,208.99 277.04,209.64 277.04,211.23 277.3,211.49 282.733,211.49 285.933,214.69 287.96,214.69 290.44,212.21 U16.7@290.44,211.36 ; U1.7@290.44,224.927 v1(290.44,226.11) v1@290.45,226.12 ; v1(308.39,241.89) U9.7@309.83,241.89
  Bottom Layer 1 w0.254: v1(270.85,218.28) 270.44,218.28 265.35,223.37 v1(265.35,235.13) 265.35,238.58 270.12,243.35 273.79,243.35 274.36,242.78 v1(274.36,239.67) 275.58,240.89 292.26,240.89 295.57,237.58 307.28,237.58 308.39,238.69 v1(308.39,241.89) ; v1@274.37,224.94 v1(274.38,224.95) 290.05,224.95 290.44,225.34 v1(290.44,226.11)
OSC1_1: C7.2 U16.5 X1.2 | length 16.2
  Top Layer 1 w0.254: C7.2@278.21,210.77 280.73,210.77 X1.2@281.42,210.08 282.243,210.903 283.253,210.903 284.54,212.19 285.89,212.19 288.07,210.01 291.22,210.01 291.45,210.24 U16.5@291.45,211.05
OSC1_2: C8.1 U16.6 X1.1 | length 18.7
  Top Layer 1 w0.254: C8.1@278.21,205.42 280.86,205.42 281.68,206.24 282.911,206.24 283.06,206.389 283.06,209.55 284.89,211.38 286.161,211.38 288.041,209.5 v1(290.861,209.5)
  Bottom Layer 1 w0.254: v1(290.861,209.5) v1(290.861,210.5)
OSC2_1: C15.2 U1.5 X2.2 | length 11.3
  Top Layer 1 w0.254: U1.5@291.44,224.927 291.443,224.93 291.443,225.595 291.951,226.102 292.172,226.102 v1(292.21,226.14) ; v1(293.49,228.32) 294.6,228.32 295.14,228.86 295.14,229.715 X2.2@295.605,230.18 296.01,230.585 C15.2@296.01,233.53
  Bottom Layer 1 w0.254: v1(292.21,226.14) 292.21,226.32 293.49,227.6 v1(293.49,228.32)
OSC2_2: C16.1 U1.6 X2.1 | length 9.1
  Top Layer 1 w0.254: U1.6@290.94,224.927 290.943,224.93 290.943,225.733 291.352,226.142 v1(291.352,226.181) ; C16.1@291,233.53 291,230.685 X2.1@291.505,230.18 291.505,228.415 v1(291.493,228.403) v1@291.48,228.39
  Bottom Layer 1 w0.254: v1(291.352,226.181) 291.352,226.234 291.493,226.375 v1(291.493,228.403)
OSC3_1: C23.2 U2.5 X3.2 | length 21.9
  Top Layer 1 w0.254: C23.2@259.62,229.51 262.274,229.51 X3.2@262.716,229.068 264.152,229.068 266.41,226.81 271.279,226.81 273.79,224.299 v1(273.79,223.92) ; U2.5@275.38,227.433 275.383,227.43 275.383,223.966 v1(275.419,223.93)
  Bottom Layer 1 w0.254: v1(273.79,223.92) 273.8,223.93 v1(275.419,223.93)
OSC3_2: C24.1 U2.6 X3.1 | length 22
  Top Layer 1 w0.254: C24.1@259.62,224.6 262.349,224.6 X3.1@262.716,224.968 265.718,224.968 267.07,226.32 269.112,226.32 269.114,226.322 271.156,226.322 271.384,226.095 271.384,226.076 273.23,224.23 v1(273.23,223.55) ; U2.6@274.88,227.433 274.88,223.313 274.94,223.253 v1(274.94,223.2)
  Bottom Layer 1 w0.254: v1(273.23,223.55) 273.283,223.55 273.633,223.2 v1(274.94,223.2)
OSC4_1: C31.2 U3.5 X4.2 | length 17
  Top Layer 1 w0.254: U3.5@275.38,241 275.383,241.003 275.383,241.668 275.975,242.26 281.05,242.26 281.81,241.5 281.81,237.86 282.22,237.45 X4.2@283.72,237.45 284.21,236.96 C31.2@287.15,236.96
OSC4_2: C32.1 U3.6 X4.1 | length 15
  Top Layer 1 w0.254: U3.6@274.88,241 274.883,241.003 274.883,241.983 275.64,242.74 283.53,242.74 283.68,242.59 283.68,241.59 X4.1@283.72,241.55 284.375,242.205 286.033,242.205 286.148,242.09 C32.1@287.15,242.09
OSC5_1: C43.2 U9.5 X5.2 | length 8.5
  Top Layer 1 w0.254: U9.5@309.83,240.89 314.66,240.89 X5.2@314.73,240.96 315.49,240.2 317.84,240.2 C43.2@317.92,240.28
OSC5_2: C42.1 U9.6 X5.1 | length 11.1
  Top Layer 1 w0.254: U9.6@309.83,241.39 311.84,241.39 312.85,242.4 312.85,244.73 313.18,245.06 X5.1@314.73,245.06 315.07,245.4 C42.1@317.92,245.4
PGND: 1.2 C33.1 C34.1 C39.1 C40.1 R4.1 U8.1 U13.1 | length 18.1
  Top Layer 1 w0.762: 1.2@253.442,237.48 256.874,237.48 257.511,236.843 R4.1@257.54,236.843 258.923,236.843 v1(258.93,236.85) ; C40.1@255.53,239.925 C39.1@255.53,241.975 ; C33.1@262.91,239.92 C34.1@262.91,241.97
  Top Layer 1 w1.524: U8.1@231.26,242.66 v1(236.3,242.66) v1@236.32,242.68 ; v1(241.94,244.51) U13.1@241.94,247.655
  other v1: 255.53,240.95 262.91,240.945 235.12,242.7
PWM1_1: FPC1.40 U16.10 | length 56.1
  Top Layer 1 w0.254: U16.10@288.94,211.36 v1(288.94,212.8)
  Bottom Layer 1 w0.254: v1(288.94,212.8) 288.94,213.921 288.791,214.07 287.26,214.07 284.99,211.8 284.99,205.59 286.24,204.34 293.12,204.34 293.63,203.83 306.13,203.83 311.29,208.99 311.29,212.12 312.54,213.37 FPC1.40@320.81,213.37
PWM1_2: FPC1.39 U16.11 | length 53.3
  Top Layer 1 w0.254: U16.11@288.44,211.36 288.44,213.39 v1(288.45,213.4)
  Bottom Layer 1 w0.254: v1(288.45,213.4) 288.397,213.4 288.287,213.51 287.4,213.51 285.46,211.57 285.46,206.08 286.59,204.95 293.42,204.95 294.13,204.24 305.36,204.24 310.65,209.53 310.65,212.67 311.85,213.87 FPC1.39@320.81,213.87
PWM1_3: FPC1.38 U16.12 | length 50.3
  Top Layer 1 w0.254: U16.12@287.94,211.36 v1(287.94,212.93)
  Bottom Layer 1 w0.254: v1(287.94,212.93) 285.87,210.86 285.87,206.58 286.88,205.57 293.83,205.57 294.63,204.77 304.69,204.77 309.97,210.05 309.97,213.15 311.19,214.37 FPC1.38@320.81,214.37
PWM2_1: FPC1.37 U16.16 | length 44.5
  Top Layer 1 w0.254: U16.16@286.44,208.36 287.7,208.36 v1(287.71,208.35)
  Bottom Layer 1 w0.254: v1(287.71,208.35) 286.96,208.35 286.58,207.97 286.58,206.65 287.11,206.12 294.41,206.12 295.21,205.32 304.17,205.32 309.33,210.48 309.33,213.61 310.59,214.87 FPC1.37@320.81,214.87
PWM2_2: FPC1.36 U16.17 | length 43.6
  Top Layer 1 w0.254: U16.17@286.44,207.86 288.21,207.86 v1(288.22,207.85)
  Bottom Layer 1 w0.254: v1(288.22,207.85) 287.29,207.85 287.14,207.7 287.14,206.91 287.41,206.64 294.79,206.64 295.58,205.85 303.8,205.85 308.74,210.79 308.74,213.96 310.15,215.37 FPC1.36@320.81,215.37
PWM2_3: FPC1.35 U16.18 | length 40.6
  Top Layer 1 w0.254: U16.18@286.44,207.36 v1(287.87,207.36)
  Bottom Layer 1 w0.254: v1(287.87,207.36) 294.843,207.36 295.822,206.381 303.451,206.381 308.21,211.14 308.21,214.31 309.77,215.87 FPC1.35@320.81,215.87
PWM3_1: FPC1.34 U16.42 | length 31.7
  Top Layer 1 w0.254: U16.42@294.94,206.86 v1(296.02,206.86)
  Bottom Layer 1 w0.254: v1(296.02,206.86) 303.13,206.86 307.65,211.38 307.65,214.63 309.39,216.37 FPC1.34@320.81,216.37
PWM3_2: FPC1.33 U16.43 | length 31.8
  Top Layer 1 w0.254: U16.43@294.94,207.36 v1(296.58,207.36)
  Bottom Layer 1 w0.254: v1(296.58,207.36) 302.9,207.36 307.14,211.6 307.14,215.02 308.99,216.87 FPC1.33@320.81,216.87
PWM3_3: FPC1.32 U16.45 | length 31.7
  Top Layer 1 w0.254: U16.45@294.94,208.36 296.2,208.36 v1(296.21,208.35)
  Bottom Layer 1 w0.254: v1(296.21,208.35) 303.11,208.35 306.59,211.83 306.59,215.47 308.49,217.37 FPC1.32@320.81,217.37
PWM4_1: FPC1.31 U1.10 | length 55
  Top Layer 1 w0.254: U1.10@288.94,224.927 288.94,226.5 289.1,226.66 296.91,226.66 298.66,228.41 302.02,228.41 303.27,227.16 v1(303.27,213.89)
  Bottom Layer 1 w0.254: v1(303.27,213.89) 303.27,212.11 304.05,211.33 305.27,211.33 306.06,212.12 306.06,215.86 308.07,217.87 FPC1.31@320.81,217.87
PWM4_2: FPC1.30 U1.11 | length 56.1
  Top Layer 1 w0.254: U1.11@288.44,224.927 288.44,226.991 288.589,227.14 296.487,227.14 298.345,228.998 302.462,228.998 303.93,227.53 v1(303.93,213.558)
  Bottom Layer 1 w0.254: v1(303.93,213.558) 303.93,212.26 304.24,211.95 304.98,211.95 305.47,212.44 305.47,216.1 307.74,218.37 FPC1.30@320.81,218.37
PWM4_3: FPC1.29 U1.12 | length 55.3
  Top Layer 1 w0.254: U1.12@287.94,224.927 287.94,227.13 288.45,227.64 296.1,227.64 298.04,229.58 302.8,229.58 304.51,227.87 v1(304.51,213.266)
  Bottom Layer 1 w0.254: v1(304.51,213.266) 304.51,215.99 307.39,218.87 FPC1.29@320.81,218.87
PWM5_1: FPC1.28 U1.16 | length 46.6
  Top Layer 1 w0.254: v1(282.26,218.44) 282.298,218.478 282.298,219.038 285.187,221.927 U1.16@286.44,221.927
  Bottom Layer 1 w0.254: v1(282.26,218.44) 282.969,217.731 284.36,216.34 304.01,216.34 307.04,219.37 FPC1.28@320.81,219.37
PWM5_2: FPC1.27 U1.17 | length 44.6
  Top Layer 1 w0.254: v1(283.35,218.406) 283.312,218.443 283.312,218.775 283.203,218.885 283.203,219.183 285.447,221.427 U1.17@286.44,221.427
  Bottom Layer 1 w0.254: v1(283.35,218.406) 283.382,218.374 283.382,218.088 284.65,216.82 303.59,216.82 306.64,219.87 FPC1.27@320.81,219.87
PWM5_3: FPC1.26 U1.18 | length 42.4
  Top Layer 1 w0.254: v1(284.12,218.43) 284.12,219.272 285.664,220.816 285.71,220.816 285.821,220.927 U1.18@286.44,220.927
  Bottom Layer 1 w0.254: v1(284.12,218.43) 284.158,218.392 284.158,218.192 285.02,217.33 303.09,217.33 306.13,220.37 FPC1.26@320.81,220.37
PWM6_1: FPC1.25 U1.42 | length 34.9
  Top Layer 1 w0.254: v1(292.15,217.929) 292.14,217.939 292.14,219.88 292.687,220.427 U1.42@294.94,220.427
  Bottom Layer 1 w0.254: v1(292.15,217.929) 292.179,217.9 302.74,217.9 305.71,220.87 FPC1.25@320.81,220.87
PWM6_2: FPC1.24 U1.43 | length 37
  Top Layer 1 w0.254: v1@291.1,218.5 v1(291.11,218.51) 291.11,220.65 291.387,220.927 U1.43@294.94,220.927
  Bottom Layer 1 w0.254: v1(291.11,218.51) 302.41,218.51 305.27,221.37 FPC1.24@320.81,221.37
PWM6_3: FPC1.23 U1.45 | length 40.3
  Top Layer 1 w0.254: v1(289.877,218.483) 289.866,218.495 289.866,220.922 290.871,221.927 U1.45@294.94,221.927
  Bottom Layer 1 w0.254: v1(289.877,218.483) 289.877,218.487 290.52,219.13 302.08,219.13 304.82,221.87 FPC1.23@320.81,221.87
PWM7_1: FPC1.22 U2.10 | length 68.9
  Top Layer 1 w0.254: v1(272.88,226.1) U2.10@272.88,227.433
  Bottom Layer 1 w0.254: v1(272.88,226.1) 272.88,228.82 272.62,229.08 270.29,229.08 268.74,227.53 268.74,221.56 270.67,219.63 301.74,219.63 304.48,222.37 FPC1.22@320.81,222.37
PWM7_2: FPC1.21 U2.11 | length 63.3
  Top Layer 1 w0.254: v1(270.98,228.52) 271,228.54 272.231,228.54 272.38,228.391 U2.11@272.38,227.433
  Bottom Layer 1 w0.254: v1(270.98,228.52) 270.942,228.482 270.731,228.482 270.201,227.952 269.29,227.041 269.29,221.82 270.95,220.16 301.38,220.16 304.09,222.87 FPC1.21@320.81,222.87
PWM7_3: FPC1.20 U2.12 | length 59.3
  Top Layer 1 w0.254: v1@271.01,227.43 v1(271.013,227.433) U2.12@271.88,227.433
  Bottom Layer 1 w0.254: v1(271.013,227.433) 269.84,226.26 269.84,222.08 271.17,220.75 301,220.75 303.62,223.37 FPC1.20@320.81,223.37
PWM8_1: FPC1.19 U2.16 | length 56.1
  Top Layer 1 w0.254: U2.16@270.38,224.433 271.567,224.433 v1(271.57,224.43)
  Bottom Layer 1 w0.254: v1(271.57,224.43) 270.89,224.43 270.39,223.93 270.39,222.38 271.53,221.24 300.54,221.24 303.17,223.87 FPC1.19@320.81,223.87
PWM8_2: FPC1.18 U2.17 | length 55.4
  Top Layer 1 w0.254: U2.17@270.38,223.933 272.093,223.933 v1(272.1,223.94)
  Bottom Layer 1 w0.254: v1(272.1,223.94) 271.18,223.94 270.95,223.71 270.95,222.57 271.75,221.77 300.15,221.77 302.75,224.37 FPC1.18@320.81,224.37
PWM8_3: FPC1.17 U2.18 | length 51.9
  Top Layer 1 w0.254: U2.18@270.38,223.433 v1(271.687,223.433) v1@271.7,223.42
  Bottom Layer 1 w0.254: v1(271.687,223.433) 272.752,222.368 299.888,222.368 302.39,224.87 FPC1.17@320.81,224.87
PWM9_1: FPC1.16 U2.42 | length 42.9
  Top Layer 1 w0.254: U2.42@278.88,222.933 281.067,222.933 v1(281.07,222.93)
  Bottom Layer 1 w0.254: v1(281.07,222.93) 299.69,222.93 302.13,225.37 FPC1.16@320.81,225.37
PWM9_2: FPC1.15 U2.43 | length 42.9
  Top Layer 1 w0.254: U2.43@278.88,223.433 280.507,223.433 v1(280.51,223.43)
  Bottom Layer 1 w0.254: v1(280.51,223.43) 299.463,223.43 301.903,225.87 FPC1.15@320.81,225.87
PWM9_3: FPC1.14 U2.45 | length 42.7
  Top Layer 1 w0.254: U2.45@278.88,224.433 v1(280.067,224.433) v1@280.07,224.43
  Bottom Layer 1 w0.254: v1(280.067,224.433) 294.213,224.433 296.15,226.37 FPC1.14@320.81,226.37
PWM10_1: FPC1.13 U3.10 | length 75.4
  Top Layer 1 w0.254: v1(272.34,239.55) 272.72,239.55 272.88,239.71 U3.10@272.88,241
  Bottom Layer 1 w0.254: v1(272.34,239.55) 272.34,242.22 271.66,242.9 270.63,242.9 267.22,239.49 267.22,231.88 268.52,230.58 285.89,230.58 287.535,228.935 290.165,228.935 291.06,229.83 293.27,229.83 296.23,226.87 FPC1.13@320.81,226.87
PWM10_2: FPC1.12 U3.11 | length 69.8
  Top Layer 1 w0.254: v1@271.13,242.41 v1(271.14,242.4) 272.13,242.4 272.38,242.15 U3.11@272.38,241
  Bottom Layer 1 w0.254: v1(271.14,242.4) 268.06,239.32 267.88,239.14 267.88,232.17 268.96,231.09 286.34,231.09 288.02,229.41 289.67,229.41 290.65,230.39 293.79,230.39 296.81,227.37 FPC1.12@320.81,227.37
PWM10_3: FPC1.11 U3.12 | length 64.5
  Top Layer 1 w0.254: v1(271.18,241) U3.12@271.88,241
  Bottom Layer 1 w0.254: v1(271.18,241) 268.56,238.38 268.56,232.48 269.4,231.64 293.511,231.64 297.281,227.87 FPC1.11@320.81,227.87
PWM11_1: FPC1.10 U3.16 | length 62.6
  Top Layer 1 w0.254: U3.16@270.38,238 272.02,238 v1(272.03,237.99)
  Bottom Layer 1 w0.254: v1(272.03,237.99) 270.09,237.99 269.17,237.07 269.17,232.81 269.86,232.12 293.889,232.12 297.639,228.37 FPC1.10@320.81,228.37
PWM11_2: FPC1.9 U3.17 | length 60.1
  Top Layer 1 w0.254: U3.17@270.38,237.5 v1(271.63,237.5)
  Bottom Layer 1 w0.254: v1(271.63,237.5) 270.3,237.5 269.76,236.96 269.76,232.98 270.18,232.56 294.25,232.56 297.94,228.87 FPC1.9@320.81,228.87
PWM11_3: FPC1.8 U3.18 | length 59.1
  Top Layer 1 w0.254: U3.18@270.38,237 272.02,237 v1(272.03,236.99)
  Bottom Layer 1 w0.254: v1(272.03,236.99) 270.62,236.99 270.33,236.7 270.33,233.18 270.49,233.02 294.7,233.02 298.35,229.37 FPC1.8@320.81,229.37
PWM12_1: FPC1.7 U3.42 | length 46
  Top Layer 1 w0.254: U3.42@278.88,236.5 280.51,236.5 v1@280.52,236.49
  Bottom Layer 1 w0.254: v1(280.537,236.491) 282.146,238.1 292.67,238.1 300.9,229.87 FPC1.7@320.81,229.87
PWM12_2: FPC1.6 U3.43 | length 46.1
  Top Layer 1 w0.254: U3.43@278.88,237 v1(280.04,237)
  Bottom Layer 1 w0.254: v1(280.04,237) 281.72,238.68 292.86,238.68 301.17,230.37 FPC1.6@320.81,230.37